# EAGLE board bluetooth_bma400_v2 (EAGLE 9.6.2)
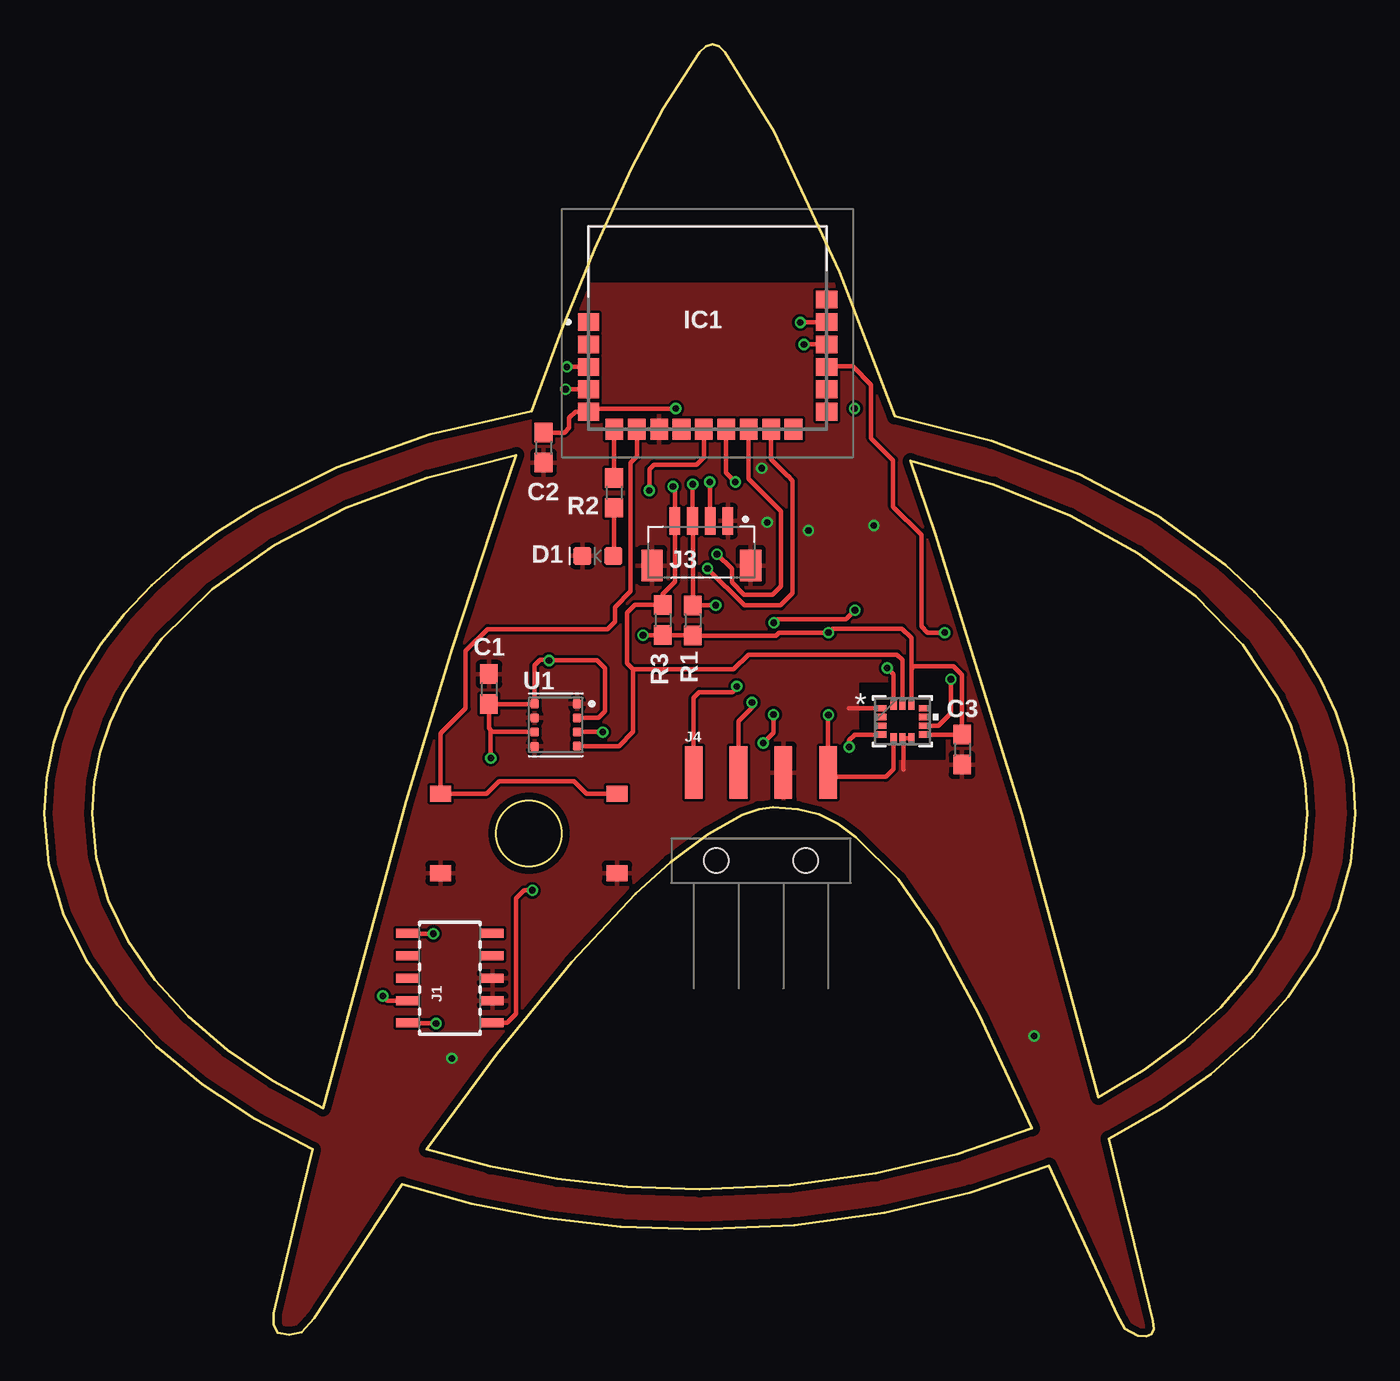
[diagram p0: board, top side]
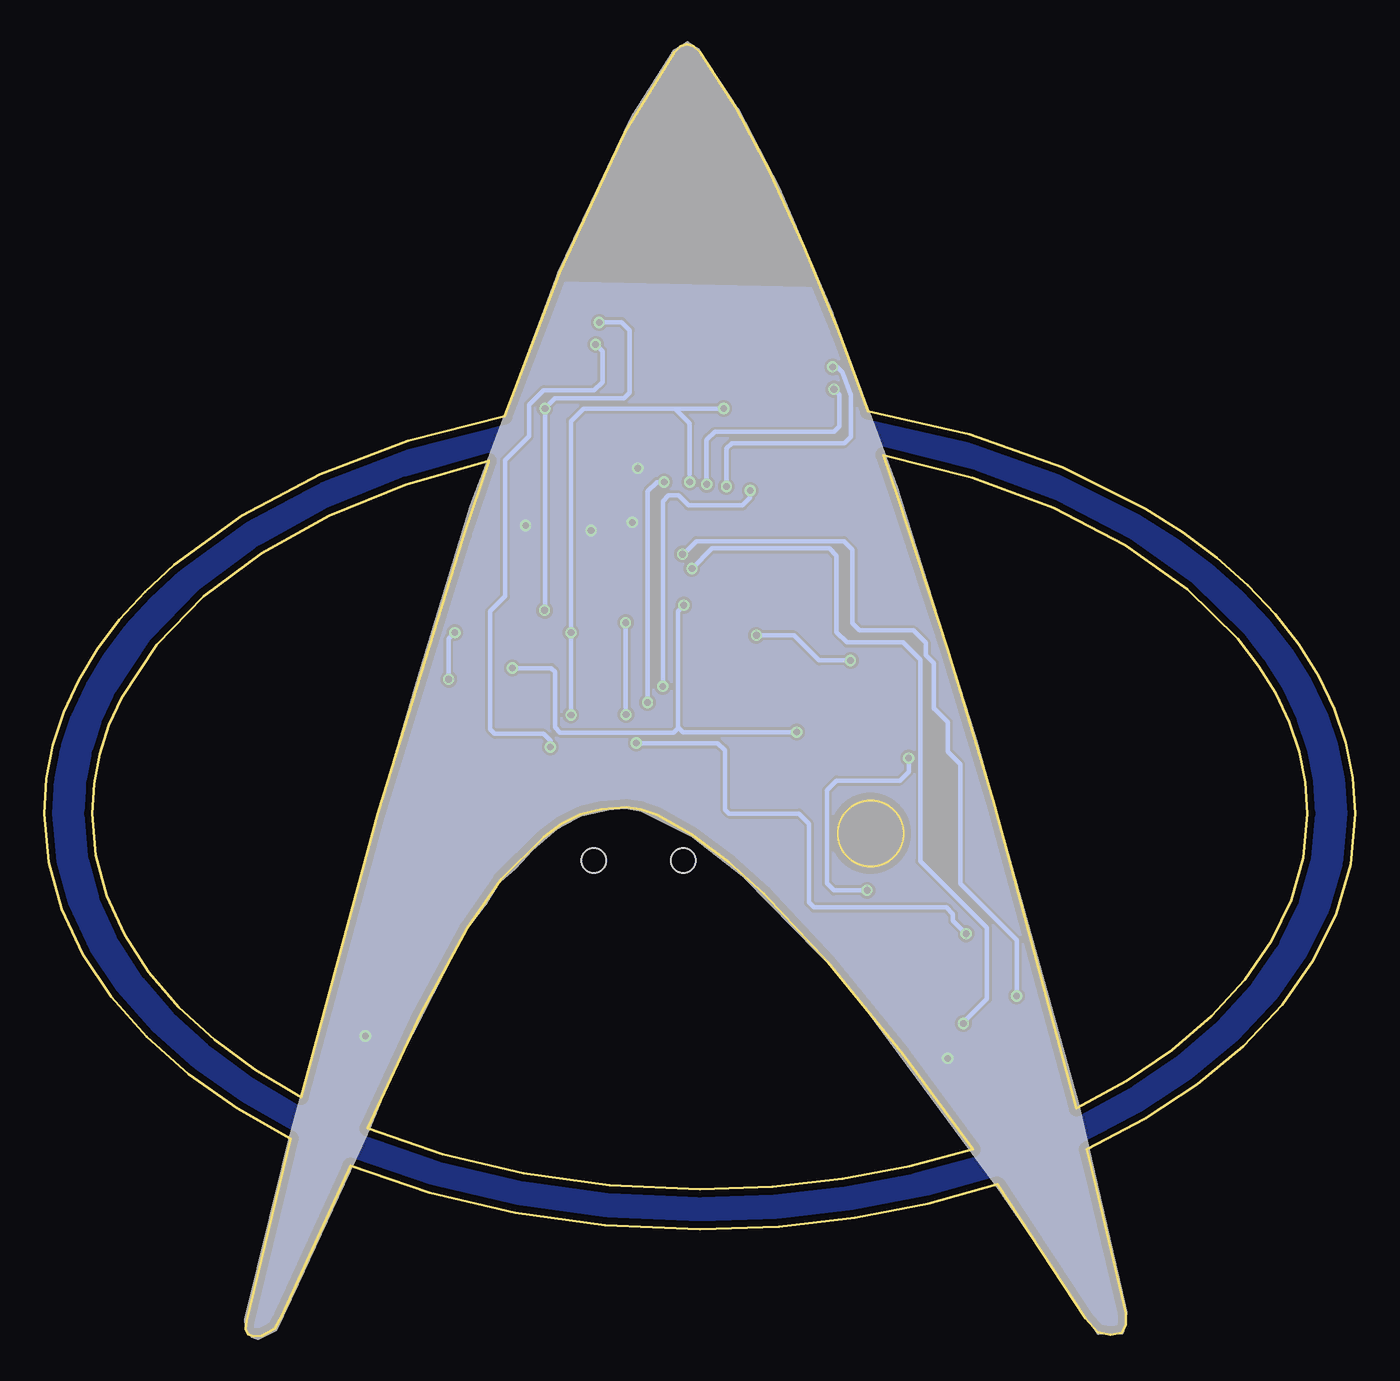
[diagram p1: board, bottom side, seen from below]

Size 74.35 x 73.25 mm. Coordinates in mm from the lower left corner, seen from the top.
Outline: 50.38,23.13 53,18.26 56.01,11.8 51.76,10.34 47.17,9.25 42.29,8.57 37.17,8.34 33.06,8.49 29.09,8.93 25.29,9.64 21.69,10.61 25.67,16 29.9,21.2 33.53,25.1 35.51,26.88 37.65,28.47 39.61,29.57 40.52,29.89 41.33,30.01 42.74,29.9 43.93,29.59 45,29.06 46.04,28.29 48.45,25.92 50.38,23.13
Outline: 49.13,49.62 53.87,48.28 58.18,46.52 62.02,44.4 65.3,41.94 67.97,39.2 69.95,36.21 70.67,34.63 71.2,33.01 71.51,31.34 71.62,29.64 71.41,27.26 70.79,24.97 69.79,22.76 68.42,20.66 66.71,18.67 64.69,16.82 62.37,15.11 59.78,13.56 55.44,29.59 50.54,45.46 49.13,49.62
Outline: 15.82,12.93 12.97,14.49 10.41,16.24 8.17,18.15 6.28,20.21 4.77,22.41 3.65,24.72 2.96,27.14 2.73,29.64 2.84,31.41 3.19,33.13 3.75,34.82 4.52,36.45 5.49,38.02 6.66,39.53 9.52,42.34 13.03,44.84 17.13,46.96 21.73,48.68 26.76,49.95 25.93,47.55 23.12,38.98 20.52,30.35 15.82,12.93
Outline: 29.32,56.97 27.64,52.43 21.88,51.13 16.61,49.28 11.9,46.93 9.79,45.58 7.85,44.13 6.1,42.58 4.55,40.95 3.21,39.23 2.08,37.43 1.19,35.57 0.54,33.65 0.14,31.67 0,29.64 0.28,26.75 1.08,23.97 2.39,21.31 4.15,18.8 6.36,16.45 8.96,14.29 11.93,12.34 15.23,10.61 14.68,8.39 13.02,1.33 13.02,0.66 13.23,0.22 13.91,0.11 14.61,0.24 15.32,1.04 20.31,8.62 24.23,7.53 28.36,6.73 32.69,6.23 37.17,6.06 42.53,6.31 47.66,7.01 52.49,8.15 56.98,9.69 60.85,1.2 61.28,0.45 62.02,0.03 62.5,0 62.79,0.12 62.91,0.4 62.87,0.88 60.37,11.21 63.41,12.94 66.15,14.87 68.54,16.98 70.55,19.25 72.17,21.67 73.36,24.22 74.1,26.88 74.35,29.64 74.22,31.6 73.85,33.52 73.23,35.39 72.4,37.2 71.34,38.94 70.08,40.62 68.61,42.22 66.97,43.74 63.15,46.5 58.7,48.86 53.7,50.76 48.24,52.15 45.08,60.34 41.38,68.32 38.6,72.79 38.26,73.13 37.89,73.25 37.52,73.13 37.17,72.79 35.1,69.59 33.31,66.2 31.21,61.63 29.32,56.97
Copper layers (1*16): Top 0.035559375mm / dielectric 1.6mm / Bottom 0.035559375mm
Design rules "oshpark-2layer": minimum track width 6mil, minimum drill 10mil, track to track 6mil, track to pad 6mil, pad to pad 6mil, via to via 6mil, smd to smd 6mil, copper to edge 15mil, drill to drill 6mil, minimum pad ring 5mil, minimum via ring 5mil, stop-mask expansion 2.5mil, vias tented up to drill 0mil, thermal gap 10mil

## Footprints (pad centres in the part's own frame; a part is rotated, then mirrored left to right if it is on the bottom)
0603 = smd 1.1 x 1: 1 -0.85,0; 2 0.85,0
LED-0603 = smd 1 x 1: A -0.877,0; C 0.877,0
BLUENRGM2SP = smd 1.2 x 1: 1 -6.75,1.27; 2 -6.75,0; 3 -6.75,-1.27; 4 -6.75,-2.54; 5 -6.75,-3.81; 15 6.75,-3.81; 16 6.75,-2.54; 17 6.75,-1.27; 18 6.75,0; 19 6.75,1.27; 20 6.75,2.54 | smd 1 x 1.2: 6 -5.29,-4.81; 7 -4.02,-4.81; 8 -2.75,-4.81; 9 -1.48,-4.81; 10 -0.21,-4.81; 11 1.06,-4.81; 12 2.33,-4.81; 13 3.6,-4.81; 14 4.87,-4.81
SAMTECH_FTSH-105-01 = smd 0.508 x 1.27: 1 -2.54,-2.413; 2 -2.54,2.413; 3 -1.27,-2.413; 4 -1.27,2.413; 5 0,-2.413; 6 0,2.413; 7 1.27,-2.413; 8 1.27,2.413; 9 2.54,-2.413; 10 2.54,2.413
CONN_BM04B-SRSS-TB(LF)(SN) = smd 0.6 x 1.55: 1 -1.5,-1.325; 2 -0.5,-1.325; 3 0.5,-1.325; 4 1.5,-1.325 | smd 1.2 x 1.8: S1 -2.8,1.2; S2 2.8,1.2
1X04_SMD_RA_MALE = smd 1 x 3: 1 -3.81,5; 2 -1.27,5; 3 1.27,5; 4 3.81,5 | hole 1.4: -2.54,0; 2.54,0
REVERSE_TACTILE = smd 1.2 x 0.9: P$1 -5,2.25; P$2 5,2.25; P$3 5,-2.25; P$4 -5,-2.25
PSON80P300X300X100-8N = smd 0.5 x 0.5: 1 1.2,1.2; 2 1.2,0.4; 3 1.2,-0.4; 4 1.2,-1.2; 5 -1.2,-1.22; 6 -1.2,-0.4; 7 -1.2,0.4; 8 -1.2,1.2
LGA-14L_2P5X3X0P83_STM-M = smd 0.577 x 0.352: 1 -1.21,0.75; 2 -1.21,0.25; 3 -1.21,-0.25; 4 -1.21,-0.75; 8 1.21,-0.75; 9 1.21,-0.25; 10 1.21,0.25; 11 1.21,0.75 | smd 0.352 x 0.577: 5 -0.5,-0.956; 6 0,-0.956; 7 0.5,-0.956; 12 0.5,0.956; 13 0,0.956; 14 -0.5,0.956

## Placement (x,y rotation side)
C1  0.1uF  [0603]  25.22,36.69 270 top
C2  0.1uF  [0603]  28.32,50.38 270 top
C3  0.1uF  [0603]  52.05,33.26 270 top
D1  BLUE  [LED-0603]  31.4,44.24 180 top
IC1  BLUENRG-M2SP  [BLUENRGM2SP]  37.62,56.23 0 top
J1  CORTEX_DEBUG_SMD  [SAMTECH_FTSH-105-01]  23.01,20.31 90 top
J3  QWIIC  [CONN_BM04B-SRSS-TB(LF)(SN)]  37.26,44.9 180 top
J4  [1X04_SMD_RA_MALE]  40.64,26.96 0 top
R1  2.2k  [0603]  36.78,40.58 270 top
R2  820  [0603]  32.31,47.82 270 top
R3  2.2k  [0603]  35.08,40.6 270 top
SW1  REVERSE_SWITCH  [REVERSE_TACTILE]  27.48,28.51 0 top
U1  BME680  [PSON80P300X300X100-8N]  29.01,34.66 0 top
U2  LSM6DSO32TRLGA-14L_2P5X3X0P83_STM-M  [LGA-14L_2P5X3X0P83_STM-M]  48.67,34.86 0 top

## Library data of the parts
C1-C3 = SparkFun-Capacitors; PROD_ID: CAP-00810
D1 = SparkFun-LED; PROD_ID: DIO-08575
IC1 = SamacSys_Parts; ARROW_PART_NUMBER: BLUENRG-M2SP; ARROW_PRICE-STOCK: https://www.arrow.com/en/products/bluenrg-m2sp/stmicroelectronics; DESCRIPTION: STMicroelectronics; HEIGHT: 2.5mm; MANUFACTURER_NAME: STMicroelectronics; MANUFACTURER_PART_NUMBER: BLUENRG-M2SP; MOUSER_PART_NUMBER: 511-BLUENRG-M2SP; MOUSER_PRICE-STOCK: https://www.mouser.co.uk/ProductDetail/STMicroelectronics/BLUENRG-M2SP?qs=%252B6g0mu59x7IAMQd6TX9bOA%3D%3D
J1 = SparkFun-Connectors
J3 = BM04B-SRSS-TB_LF__SN_
J4 = SparkFun-Connectors; PROD_ID: CONN-09140; SF_ID: PRT-12638
R1 R3 = SparkFun-Resistors; PROD_ID: RES-08272
R2 = SparkFun-Resistors; PROD_ID: RES-10646; SPICEPREFIX: R
SW1 = reverse_mount_sw
U1 = BME680; AVAILABILITY: In Stock; DESCRIPTION: Gas, Humidity, Pressure, Temperature Sensor I²C, SPI Output; MF: Bosch Sensortec; MP: BME680; PACKAGE: LGA-8 Bosch Tools; PRICE: None; PURCHASE-URL: https://pricing.snapeda.com/search/part/BME680/?ref=eda
U2 = LSM6DSO32; COPYRIGHT: Copyright (C) 2022 Ultra Librarian. All rights reserved.; MANUFACTURER_PART_NUMBER: LSM6DSO32TR; MFR_NAME: STMicroelectronics

## Nets
BUTTON: IC1.7 SW1.P$1 SW1.P$2
GND: C1.1 C2.2 C3.2 D1.C IC1.8 J1.3 J1.5 J3.1 J3.S1 J3.S2 J4.3 SW1.P$3 SW1.P$4 U1.1 U1.5 U1.7 U2.1 U2.6 U2.7
INT1: IC1.18 U2.4
INT2: IC1.17 U2.9
N$1: D1.A R2.2
NRST: IC1.19 J1.10
RX: IC1.11 J4.2
SCL: IC1.3 J3.4 R3.1 U1.4 U2.13
SDA: IC1.4 J3.3 R1.1 U1.3 U2.14
SWCLK: IC1.12 J1.4
SWDIO: IC1.13 J1.2
TEST: IC1.6 R2.1
TX: IC1.10 J4.1
VIN: C1.2 C2.1 C3.1 IC1.5 J1.1 J3.2 J4.4 R1.2 R3.2 U1.2 U1.6 U1.8 U2.5 U2.8 U2.12

## Tracks (layer width: path | path; a pad name or v marks a point on that pad's centre or on a via)
BUTTON
  Top 0.254: SW1.P$2 30.75,30.76 30.05,31.46 25.78,31.46 25.09,30.76 SW1.P$1 22.48,34.18 23.9,35.6 23.9,38.85 25.15,40.1 31.95,40.1 32.36,40.5 32.36,41.34 33.25,42.23 33.25,49.52 33.61,49.88 IC1.7
GND  (via drill 0.38)
  Top 0.254: U2.7 U2.6 48.72,33.86 48.72,32.12 | U2.1 47.44,35.6 45.62,35.6
  other vias: 56.14,17.03 23.12,15.76 40.69,49.22 41,46.14 43.33,45.68 47.04,45.96
  pour Top: 0.26,-3.29 0.26,59.68 72.9,59.68 84.08,9.41 32.01,-21.07
  pour Bottom: -2.28,6.87 -2.28,58.71 105.9,61.09 87.89,4.33 19.31,-10.91
INT1  (via drill 0.38)
  Top 0.254: U2.4 45.98,34.11 | 45.98,34.11 45.94,34.11 | 45.98,34.11 45.65,33.78 v45.65,33.42 | v43.08,56.23 IC1.18
  Bottom 0.254: v45.65,33.42 45.65,33.77 46.03,34.15 48.79,34.15 49.05,34.41 49.05,41.11 48.21,41.95 48.21,49.67 46.86,51.02 46.86,52.8 46.03,53.63 43.16,53.63 42.7,54.09 42.7,55.84 v43.08,56.23
INT2  (via drill 0.38)
  Top 0.254: U2.9 50.7,34.61 51.41,35.32 v51.41,37.25 | v51.06,39.89 50.09,39.89 49.73,40.25 49.73,45.43 48.13,47.03 48.13,49.67 46.89,50.92 46.89,53.94 45.85,54.98 44.39,54.98 IC1.17
  Bottom 0.254: v51.41,37.25 51.41,39.54 v51.06,39.89
N$1
  Top 0.254: R2.2 32.31,44.27 D1.A
NRST  (via drill 0.38)
  Top 0.254: v42.88,57.47 42.9,57.5 IC1.19 | v45.98,41.16 45.47,40.66 41.58,40.66 v41.38,40.46 | v41.35,35.25 41.35,34.22 v40.77,33.63 | v22.07,22.82 20.63,22.82 J1.10
  Bottom 0.254: v42.88,57.47 42.85,57.5 41.61,57.5 41.15,57.04 41.15,53.48 41.45,53.18 45.39,53.18 45.95,52.62 v45.95,52.59 45.95,41.19 v45.98,41.16 | v41.38,40.46 41.38,35.27 v41.35,35.25 | v40.77,33.63 36.16,33.63 35.74,33.21 35.74,29.86 35.51,29.63 31.55,29.63 30.99,29.07 30.99,24.6 30.71,24.32 23.19,24.32 22.81,23.94 22.81,23.56 v22.07,22.82
RX  (via drill 0.38)
  Top 0.254: J4.2 39.37,34.86 40.13,35.63 v40.13,35.93 | v39.19,48.43 38.66,48.96 38.66,51.4 IC1.11
  Bottom 0.254: v40.13,35.93 40.13,47.89 39.6,48.43 v39.19,48.43
SCL  (via drill 0.38)
  Top 0.254: v35.66,48.17 35.76,48.07 J3.4 35.76,42.79 35.05,42.08 35.05,41.47 | v29.64,54.96 IC1.3 | U2.13 48.67,38.34 48.36,38.65 39.93,38.65 39.09,37.81 33.4,37.81 | 33.4,37.81 33.05,38.17 33.05,41.01 33.5,41.47 35.05,41.47 | 35.05,41.47 35.07,41.47 R3.1 | U1.4 32.58,33.46 33.4,34.28 33.4,37.81
  Bottom 0.254: v35.66,48.17 35.66,50.33 35.36,50.64 28.96,50.64 28.6,50.99 28.6,53.35 29.08,54.65 29.39,54.96 v29.64,54.96
SDA  (via drill 0.38)
  Top 0.254: v36.78,48.3 36.76,48.28 J3.3 36.78,46.2 36.78,41.47 | v29.57,53.69 IC1.4 | R1.1 36.78,41.47 | U2.14 48.17,37.52 v47.8,37.89 | v38.08,41.44 36.81,41.44 36.78,41.47 | U1.3 v31.67,34.26 v31.68,34.25
  Bottom 0.254: v36.78,48.3 36.78,50.82 36.32,51.27 29.57,51.27 29.26,51.58 29.26,53.38 v29.57,53.69 | v47.8,37.89 45.59,37.89 45.39,37.68 45.39,34.53 45.09,34.23 38.66,34.23 38.41,34.48 38.41,34.53 | v38.08,41.44 38.41,41.11 38.41,34.53 | v31.68,34.25 38.13,34.25 38.41,34.53
SWCLK  (via drill 0.38)
  Top 0.254: J1.4 19.46,19.04 v19.2,19.29 | IC1.12 39.95,48.61 41.78,46.78 41.78,42.54 41.3,42.05 39.68,42.05 38.99,42.74 38.99,43.5 v38.15,44.34
  Bottom 0.254: v19.2,19.29 19.2,22.47 22.4,25.67 22.4,32.43 23.12,33.14 23.12,34.81 23.88,35.58 23.9,35.58 23.9,38.17 24.36,38.62 24.36,39.31 25.07,40.02 28.12,40.02 28.53,40.43 28.53,44.59 29.01,45.08 37.36,45.08 38.1,44.34 v38.15,44.34
SWDIO  (via drill 0.38)
  Top 0.254: IC1.13 41.2,51.4 41.2,49.72 42.14,48.78 42.17,48.78 42.44,48.5 42.44,42.13 41.76,41.44 39.7,41.44 v37.62,43.53 | v22.23,17.74 20.63,17.74 J1.2
  Bottom 0.254: v37.62,43.53 36.48,44.67 29.82,44.67 29.41,44.26 29.41,39.92 28.83,39.33 25.66,39.33 24.66,38.34 24.66,26.94 20.88,23.15 20.88,19.14 22.25,17.77 v22.23,17.74
TEST
  Top 0.254: R2.1 32.31,51.4 IC1.6
TX  (via drill 0.38)
  Top 0.254: J4.1 36.83,36.21 37.14,36.52 39.04,36.52 39.27,36.74 v39.27,36.85 | v34.32,47.95 34.32,49.16 34.57,49.42 36.98,49.42 37.41,49.84 IC1.10
  Bottom 0.254: v39.27,36.85 39.27,47.34 38.94,47.67 38.38,47.67 37.82,47.11 34.75,47.11 34.32,47.54 v34.32,47.95
VIN  (via drill 0.38)
  Top 0.254: C2.1 29.5,51.23 29.77,51.5 29.77,52.06 30.13,52.42 IC1.5 31.05,52.59 v35.82,52.59 | v44.48,35.22 44.45,35.19 J4.4 44.7,31.71 47.73,31.71 48.17,32.15 U2.5 | J3.2 37.76,48.41 v37.75,48.43 | U2.8 C3.1 52.05,37.51 51.56,37.99 49.33,37.99 49.17,37.83 | U2.8 | 49.17,37.83 U2.12 | 49.17,37.83 49.17,39.6 48.64,40.12 44.71,40.12 v44.48,39.89 41.66,39.89 41.49,39.73 R1.2 36.76,39.75 R3.2 35.07,39.74 v33.96,39.74 | U1.6 25.45,34.26 25.33,34.38 | U1.2 31.44,35.06 31.8,35.42 31.8,37.86 31.35,38.32 v28.63,38.32 28.6,38.34 28.12,38.34 27.81,38.03 U1.8 27.79,35.84 C1.2 25.22,34.48 25.33,34.38 | J1.1 26.24,17.77 26.75,18.28 26.75,24.83 27.2,25.29 v27.69,25.29 | v25.33,32.78 25.33,34.38
  Bottom 0.254: v44.48,35.22 v44.48,39.89 44.48,51.88 43.77,52.59 38.58,52.59 | v35.82,52.59 38.58,52.59 | v37.75,48.43 37.75,51.76 38.58,52.59 | v28.63,38.32 30.41,38.32 31.83,39.74 v33.96,39.74 | v27.69,25.29 29.57,25.29 29.97,25.69 29.97,30.95 29.41,31.51 25.83,31.51 25.33,32.02 v25.33,32.78